# Allegro board dwin.brd
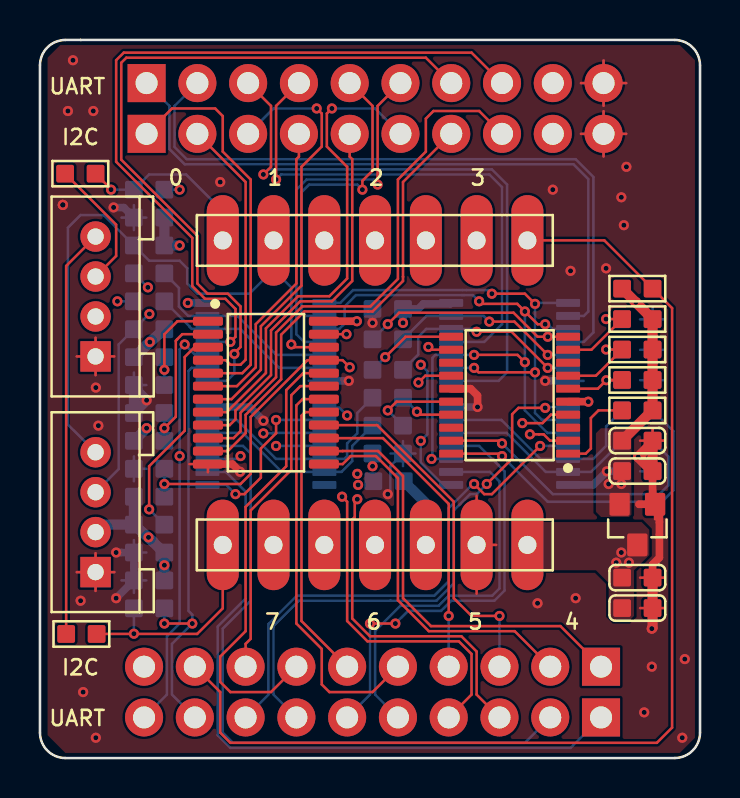
[diagram p0: board, top side]
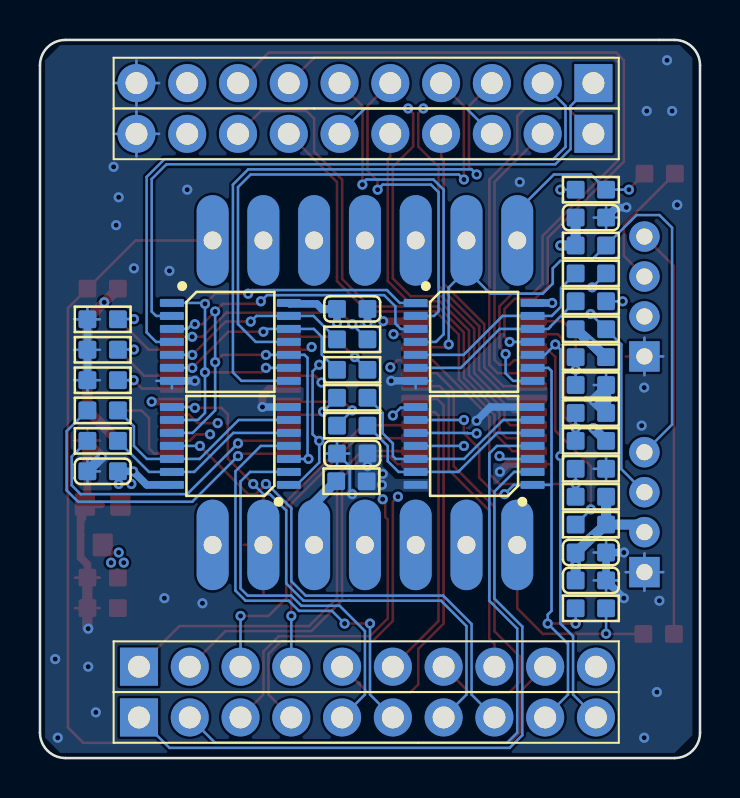
[diagram p1: board, bottom side, seen from below]

Outline 33.02 x 35.94 mm; copper layers: TOP, GND, PWR, BOTTOM. Coordinates in mm from the lower left corner of the outline.
Outline path: 0,34.67 arc(0.37,35.57) 1.27,35.94 31.75,35.94 arc(32.65,35.57) 33.02,34.67 33.02,1.27 arc(32.65,0.37) 31.75,0 1.27,0 arc(0.37,0.37) 0,1.27 0,34.67

## Design rules (mm)
constraint set DEFAULT: min track width 0.127

## Placement (name value [footprint] x y rotation side)
C1  100nF  [C0603]  5.46 8.89 180 bottom
C2  10uF  [C0603]  5.46 10.29 180 bottom
C3  100nF  [C0603]  17.4 22.48 180 bottom
C4  100nF  [C0603]  17.4 15.24 0 bottom
C5  100nF  [C0603]  5.46 27.05 180 bottom
C6  100nF  [C0603]  29.88 14.35 0 bottom
C7  100nF  [C0603]  29.88 7.51 0 top
C8  10uF  [C0603]  29.88 9.03 0 top
C9  100nF  [C0603]  29.88 14.36 0 top
C10  10uF  [C0603]  29.88 15.89 0 top
J1  Header 1x7 2.54mm  [HEADER7P_2D54_DIP_SLOT_0D9]  24.38 25.91 270 top
J2  Header 1x7 2.54mm  [HEADER7P_2D54_DIP_SLOT_0D9]  24.38 10.67 270 top
J3  Header 1x10 2.54mm  [HEADER10P_2D54_DIP]  5.33 31.24 270 bottom
J4  Header 1x10 2.54mm  [HEADER10P_2D54_DIP]  28.07 4.57 90 bottom
J5  Header 1x10 2.54mm  [HEADER10P_2D54_DIP]  5.33 33.78 270 bottom
J6  Header 1x10 2.54mm  [HEADER10P_2D54_DIP]  28.07 2.03 90 bottom
J7  Grove 4P 2.0mm  [HEADER4P-2_0-GROVE-DIP]  2.78 23.1 180 top
J8  Grove 4P 2.0mm  [HEADER4P-2_0-GROVE-DIP]  2.78 12.31 180 top
R1  10K  [R0603]  29.88 23.5 180 top
R2  0R  [R0603]  5.46 28.45 180 bottom
R3  0R  [R0603]  5.46 7.49 0 bottom
R4  10K  [R0603]  5.46 11.68 180 bottom
R5  DNP  [R0603]  5.46 20.07 0 bottom
R6  DNP  [R0603]  5.46 15.88 0 bottom
R7  DNP  [R0603]  5.46 13.08 0 bottom
R8  10K  [R0603]  5.46 18.67 0 bottom
R9  10K  [R0603]  5.46 17.27 0 bottom
R10  10K  [R0603]  5.46 14.48 0 bottom
R11  DNP  [R0603]  29.88 18.92 0 top
R12  10K  [R0603]  29.88 17.4 0 top
R13  0R  [R0603]  17.4 20.95 0 bottom
R14  0R  [R0603]  17.4 16.64 180 bottom
R15  DNP  [R0603]  29.88 20.45 0 top
R16  DNP  [R0603]  29.88 21.97 0 top
R17  0R  [R0603]  17.4 19.43 0 bottom
R18  0R  [R0603]  17.4 18.03 180 bottom
R19  0R  [R0603]  5.46 24.26 0 bottom
R20  0R  [R0603]  29.88 15.88 180 bottom
R21  0R  [R0603]  5.46 22.86 0 bottom
R22  0R  [R0603]  29.88 17.4 180 bottom
R23  10K  [R0603]  29.88 18.91 0 bottom
R24  10K  [R0603]  29.88 20.43 0 bottom
R25  10K  [R0603]  29.88 21.96 0 bottom
R26  4.7K  [R0603]  5.46 21.46 0 bottom
R27  4.7K  [R0603]  5.46 25.65 0 bottom
R28  0R  [R0603]  2.07 6.21 180 top
R29  0R  [R0603]  2.02 29.25 180 top
R30  DNP  [R0603]  17.44 13.86 180 bottom
U1  CONTROLLER-TCA9548A  [TSSOP24_0D65_7_8X4_4X1D2MM]  11.3 18.29 270 top
U2  PCF8574  [TSSOP20-0_65-6_5X4_4X1MM]  23.5 18.16 90 top
U3  CD4066  [TSSOP14_0D65_5X4D4X1D2MM]  23.5 20.83 270 bottom
U4  CD4066  [TSSOP14_0D65_5X4D4X1D2MM]  11.3 15.62 90 bottom
U5  CD4066  [TSSOP14_0D65_5X4D4X1D2MM]  11.3 20.83 270 bottom
U6  CD4066  [TSSOP14_0D65_5X4D4X1D2MM]  23.5 15.62 90 bottom
U7  XC6206P332MR-G  [SOT23]  29.88 11.68 180 top

## Library data of the parts
C1-C10 = CC
J1 J2 = Header 1x7
J3-J6 = Header 1x10
J7 J8 = Header_4P
R1-R30 = R
U1 = TCA9548A
U2 = PCF8574
U3-U6 = CD4066
U7 = LDO_3P

## Footprints (pads in the part's own frame, mm; a bottom-side part is the same pattern mirrored in y, then rotated)
C0603
  rrect 0.889x0.889 smd: 1(-0.762,0) 2(0.762,0)
HEADER4P-2_0-GROVE-DIP
  rect 1.524x1.524 hole 0.813: 1(0,3)
  round 1.524 hole 0.813: 2(0,1) 3(0,-1) 4(0,-3)
HEADER7P_2D54_DIP_SLOT_0D9
  oval 4.532x1.6 hole 0.9: 1(0,0) 2(0,-2.54) 3(0,-5.08) 4(0,-7.62) 5(0,-10.16) 6(0,-12.7) 7(0,-15.24)
HEADER10P_2D54_DIP
  rect 1.905x1.905 hole 1.1: 1(0,0)
  round 1.905 hole 1.1: 2(0,-2.54) 3(0,-5.08) 4(0,-7.62) 5(0,-10.16) 6(0,-12.7) 7(0,-15.24) 8(0,-17.78) 9(0,-20.32) 10(0,-22.86)
R0603
  rrect 0.889x0.889 smd: 1(-0.762,0) 2(0.762,0)
SOT23
  rrect 1.016x1.143 smd: 1(-0.889,-1.016) 2(0.889,-1.016) 3(0,1.016)
TSSOP14_0D65_5X4D4X1D2MM
  rrect 0.4x1.2 smd: 1(-1.95,-2.925) 2(-1.3,-2.925) 3(-0.65,-2.925) 4(0,-2.925) 5(0.65,-2.925) 6(1.3,-2.925) 7(1.95,-2.925) 8(1.95,2.925) 9(1.3,2.925) 10(0.65,2.925) 11(0,2.925) 12(-0.65,2.925) 13(-1.3,2.925) 14(-1.95,2.925)
TSSOP20-0_65-6_5X4_4X1MM
  rrect 0.4x1.2 smd: 1(-2.925,-2.925) 2(-2.275,-2.925) 3(-1.625,-2.925) 4(-0.975,-2.925) 5(-0.325,-2.925) 6(0.325,-2.925) 7(0.975,-2.925) 8(1.625,-2.925) 9(2.275,-2.925) 10(2.925,-2.925) 11(2.925,2.925) 12(2.275,2.925) 13(1.625,2.925) 14(0.975,2.925) 15(0.325,2.925) 16(-0.325,2.925) 17(-0.975,2.925) 18(-1.625,2.925) 19(-2.275,2.925) 20(-2.925,2.925)
TSSOP24_0D65_7_8X4_4X1D2MM
  rrect 0.45x1.5 smd: 1(-3.575,-2.9) 2(-2.925,-2.9) 3(-2.275,-2.9) 4(-1.625,-2.9) 5(-0.975,-2.9) 6(-0.325,-2.9) 7(0.325,-2.9) 8(0.975,-2.9) 9(1.625,-2.9) 10(2.275,-2.9) 11(2.925,-2.9) 12(3.575,-2.9) 13(3.575,2.9) 14(2.925,2.9) 15(2.275,2.9) 16(1.625,2.9) 17(0.975,2.9) 18(0.325,2.9) 19(-0.325,2.9) 20(-0.975,2.9) 21(-1.625,2.9) 22(-2.275,2.9) 23(-2.925,2.9) 24(-3.575,2.9)

## Nets
3V3: C1.1 C2.1 C3.1 C4.1 C5.1 C6.1 C9.1 C10.1 J3.9 J7.2 J8.2 R1.2 R4.2 R5.1 R6.1 R7.1 R11.2 R12.2 R15.2 R16.2 R26.2 R27.2 R30.2 U1.24(VCC) U2.5(VCC) U3.14 U4.14 U5.14 U6.14 U7.2
5V: C7.1 C8.1 J2.1 J5.9 U7.3
GND: C1.2 C2.2 C3.2 C4.2 C5.2 C6.2 C7.2 C8.2 C9.2 C10.2 J2.2 J3.10 J5.10 J7.1 J8.1 R8.1 R9.1 R10.1 R23.2 R24.2 R25.2 U1.12 U2.15 U3.7(VSS) U4.7(VSS) U5.7(VSS) U6.7(VSS) U7.1(VSS)
A0: R5.2 R8.2 U1.1
A1: R6.2 R9.2 U1.2
A2: R7.2 R10.2 U1.21
CH0: R13.1 U2.10
CH1: R17.1 U2.11
CH2: R19.1 U2.12
CH3: R21.1 U2.14
CH4: R14.1 U2.16
CH5: R18.1 U2.17
CH6: R20.1 U2.19
CH7: R22.1 U2.20
KEY_PUSH: J1.1 J4.9 R1.1
RX: J2.7 R3.1 R28.1
RX0: J5.2 U3.4
RX1: J5.4 U3.11
RX2: J5.6 U5.4
RX3: J5.8 U5.11
RX4: J6.2 U4.4
RX5: J6.4 U4.11
RX6: J6.6 U6.4
RX7: J6.8 U6.11
SCL_0: J3.1 U1.5
SCL_1: J3.3 U1.7
SCL_2: J3.5 U1.9
SCL_3: J3.7 U1.11
SCL_4: J4.1 U1.14
SCL_5: J4.3 U1.16
SCL_6: J4.5 U1.18
SCL_7: J4.7 U1.20
SDA_0: J3.2 U1.4
SDA_1: J3.4 U1.6
SDA_2: J3.6 U1.8
SDA_3: J3.8 U1.10
SDA_4: J4.2 U1.13
SDA_5: J4.4 U1.15
SDA_6: J4.6 U1.17
SDA_7: J4.8 U1.19
TX: J1.7 R2.2 R29.1
TX0: J5.1 U3.2
TX1: J5.3 U3.8
TX2: J5.5 U5.2
TX3: J5.7 U5.8
TX4: J6.1 U4.2
TX5: J6.3 U4.8
TX6: J6.5 U6.2
TX7: J6.7 U6.8
XIAO_RX: J6.10 R2.1 U3.3 U3.10 U4.3 U4.10 U5.3 U5.10 U6.3 U6.10
XIAO_SCL: J1.6 J8.4 R27.1 U1.22 U2.2
XIAO_SDA: J1.5 J8.3 R26.1 U1.23 U2.4
XIAO_TX: J6.9 R3.2 U3.1 U3.9 U4.1 U4.9 U5.1 U5.9 U6.1 U6.9
N21649397: R4.1 U1.3
N21651335: R13.2 U3.5 U3.13
N21651359: R17.2 U3.6 U3.12
N21652555: R19.2 U5.5 U5.13
N21652587: R21.2 U5.6 U5.12
N21653000: R14.2 U4.5 U4.13
N21653032: R18.2 U4.6 U4.12
N21653118: R20.2 U6.5 U6.13
N21653150: R22.2 U6.6 U6.12
N21654351: R11.1 R23.1 U2.6
N21654354: R15.1 R24.1 U2.7
N21654357: R16.1 R25.1 U2.9
N21654696: R12.1 U2.1
N21667793: J7.4 R28.2
N21667796: J7.3 R29.2
N21669960: J2.3 R30.1

Pads without a net: J1 2 3 4; J2 4 5 6; J4 10; U2 3 8 13 18

## Via types
v1: diameter 0.508, hole 0.254, TOP to BOTTOM, 126 vias

## Routing (per net, layer and track width the routed paths; a pad name or vN(x,y) marks a point on that pad's centre or on a via; arc(x,y) is an arc through that point)
3V3: length 46.4
  TOP w0.381: U1.24 v1(15.85,21.86) ; U2.5 v1(27.43,17.84)
  TOP w0.508: v1(29.81,22.81) 29.8,22.82 ; 29.8,22.82 R16.2 R15.2 R11.2 R12.2 30.63,17.4 C10.1 ; 29.8,22.82 R1.2
  PWR w0.127: J8.2 2.78,12.25 ; J8.2 3.72,11.31 ; J8.2 1.84,11.31 ; J8.2 2.78,10.37 ; 24.52,31.24 J3.9 ; J3.9 25.65,30.11 ; J3.9 26.78,31.24 ; 2.78,21.16 J7.2 ; J7.2 1.84,22.1 ; J7.2 2.78,23.04
  PWR w0.508: 6.22,10.41 v1(6.22,9.65)
  BOTTOM w0.381: U6.14 27.68,13.67 v1(28.36,14.35) C6.1 ; v1(18.16,21.78) C3.1 18.92,22.48 19.18,22.73 20.52,22.73 U3.14 ; U5.14 v1(7.4,22.78)
  BOTTOM w0.508: v1(5.43,11.04) 6.19,10.29 C2.1 ; R6.1 v1(5.33,16.51) ; v1(6.99,25.65) R27.2 C5.1 ; J8.2 3.16,11.68 R4.2 ; C1.1 v1(6.22,9.65) C2.1 ; R4.2 5.68,10.83 ; R4.2 R7.1 ; R4.2 C2.1 ; v1(5.5,20.82) 4.74,20.07 R5.1 R26.2 5.24,20.61
  vias: v1(15.88,14.22) v1(15.91,13.67) v1(16.64,14.6) v1(28.45,13.72) v1(29.08,13.72)
5V:
  vias: v1(28.83,9.78) v1(29.08,10.29) v1(29.46,9.78)
GND: length 107.6
  TOP w0.127: 30.02,9.03 C8.2 31.27,9.03 ; 30.77,13.45 U7.1 30.77,11.95 ; J2.2 21.84,13.11 ; J2.2 21.84,8.22 ; J2.2 22.82,10.67 ; J7.1 3.72,20.1 ; J7.1 1.84,20.1 ; J7.1 2.78,21.04 ; J7.1 2.78,19.16 ; C10.2 30.65,16.51 ; C10.2 31.27,15.89 ; C10.2 30.02,15.89 ; J3.10 29.32,31.24 ; J3.10 28.19,32.37 ; J3.10 28.19,30.11 ; J3.10 27.06,31.24 ; J8.1 3.72,9.31 ; J8.1 2.78,8.37 ; J8.1 1.84,9.31 ; J8.1 2.78,10.25 ; 31.27,7.51 C7.2 30.02,7.51 ; J5.10 29.32,33.78 ; J5.10 28.19,34.91 ; J5.10 27.06,33.78 ; J5.10 28.19,32.65 ; 7.47,14.71 U1.12 8.4,14.31
  TOP w0.381: U7.1 30.65,12.83 C9.2 ; U7.1 30.99,12.49 30.99,10.03 30.65,9.69 C8.2 ; U7.1 29.97,12.7 ; v1(21.89,17.57) 21.89,18.14 21.55,18.49 U2.15 ; U1.12 9.62,14.71 v1(10.01,14.33)
  TOP w0.508: v1(30.61,6.48) 30.65,6.52 C7.2 C8.2 ; 30.65,15.79 C10.2 ; 30.65,15.79 C9.2 30.63,14.36 v1(29.93,15.07) 30.65,15.79
  GND w0.127: 2.78,8.37 J8.1 ; J8.1 1.84,9.31 ; J8.1 2.78,10.25 ; J8.1 3.72,9.31
  BOTTOM w0.127: J5.10 29.32,33.78 ; J5.10 28.19,32.65 ; J5.10 27.06,33.78 ; J5.10 28.19,34.91 ; 30.02,14.35 C6.2 ; C6.2 30.65,13.73 ; C6.2 30.65,14.97 ; R25.2 30.65,22.58 ; R25.2 31.27,21.96 ; R25.2 30.02,21.96 ; C1.2 5.32,8.89 ; C1.2 4.08,8.89 ; C1.2 4.7,8.27 ; 17.54,15.24 C4.2 ; C4.2 18.16,15.86 ; C4.2 18.78,15.24 ; C4.2 17.53,14.6 17.53,13.33 v1(17.4,13.21) ; C4.2 18.16,14.62 ; 4.08,27.05 C5.2 ; C5.2 5.32,27.05 ; C5.2 4.7,26.43 ; C5.2 4.7,27.67 ; 26.42,18.5 U3.7 27.2,18.88 ; 2.78,19.16 J7.1 ; J7.1 2.78,21.04 ; J7.1 1.84,20.1 ; 4.7,13.86 R10.1 ; R10.1 4.7,15.1 ; R10.1 5.32,14.48 ; 5.32,18.67 R8.1 4.7,19.29 ; 2.78,8.37 J8.1 ; J8.1 3.72,9.31 ; J8.1 1.84,9.31 ; J8.1 2.78,10.25 ; 30.65,18.29 R23.2 ; R23.2 30.02,18.91 ; R23.2 31.27,18.91 ; J3.10 29.32,31.24 ; J3.10 28.19,30.11 ; J3.10 28.19,32.37 ; J3.10 27.06,31.24 ; 14.23,18.5 U5.7 13.45,18.88 ; 30.02,20.43 R24.2 31.27,20.43 ; 5.32,10.29 C2.2 4.7,10.91
  BOTTOM w0.381: U3.7 v1(25.27,18.88) ; U6.7 v1(21.89,17.57) ; C5.2 4.2,27.55 3.69,27.55 v1(3.68,27.56) ; v1(3.81,10.29) C2.2 C1.2 v1(3.81,8) ; v1(16.64,21.78) C3.2 ; v1(11.18,16.88) 10.49,17.57 U4.7 ; U5.7 v1(15.45,18.88) ; R23.2 R24.2 R25.2
  BOTTOM w0.508: R8.1 4.7,18.54 ; 4.7,18.54 R9.1 v1(5.33,17.91) 4.7,18.54 ; C6.2 v1(29.93,15.07)
  vias: v1(1.14,27.69) v1(1.14,27.69) v1(1.4,32.38) v1(1.65,34.93) v1(2.03,7.87) v1(2.16,3.3) v1(2.67,32.38) v1(2.79,18.54) v1(2.79,1.02) v1(2.92,16.64) v1(9.02,28.83) v1(24.89,7.75) v1(25.65,28.45) v1(26.54,24.38) v1(26.8,8) v1(28.32,24.51) v1(29.08,28.07) v1(29.21,26.67) v1(29.34,29.59) v1(30.23,2.29) v1(30.61,4.57) v1(32.13,1.02) v1(32.26,4.95)
A0: length 5.6
  TOP w0.127: U1.1 6.88,21.86 6.22,21.21 v1(6.22,19.43)
  BOTTOM w0.127: R8.2 v1(6.22,19.43) R5.2
A1: length 7.8
  TOP w0.127: U1.2 7.12,21.21 6.86,20.95 6.86,20.95 6.79,20.89 6.79,17.08 v1(6.22,16.51)
  BOTTOM w0.127: R6.2 v1(6.22,16.51) R9.2
A2: length 15.1
  TOP w0.127: v1(6.22,13.72) 10.03,13.72 10.54,14.22 10.54,17.07 13.38,19.91 U1.21 15.14,19.91 v1(15.49,19.56)
  BOTTOM w0.127: R7.2 v1(6.22,13.72) R10.2
CH0: length 10.8
  TOP w0.127: U2.10 v1(25.4,21.09) 24.89,21.09 23.69,22.29 17.97,22.29 v1(17.4,21.72)
  BOTTOM w0.127: R13.1 v1(17.4,21.72)
CH1: length 4.6
  TOP w0.127: U2.11 18.29,21.09 v1(17.27,20.07)
  BOTTOM w0.127: v1(17.27,20.07) R17.1
CH2: length 19
  TOP w0.127: v1(19.43,20.57) 19.57,20.44 U2.12
  PWR w0.127: v1(19.43,20.57) 15.34,20.57 14.2,21.72 5.21,21.72 4.95,21.97 4.95,23.11 v1(5.4,23.56)
  BOTTOM w0.127: v1(5.4,23.56) R19.1
CH3: length 21.6
  TOP w0.127: U2.14 19.28,19.14 v1(18.94,18.8)
  PWR w0.127: v1(3.87,22.86) 3.87,21.4 5.02,20.26 8.45,20.26 9.02,19.69 10.29,19.69 11.94,21.34 13.97,21.34 14.99,20.32 16.13,20.32 17.65,18.8 v1(18.94,18.8)
  BOTTOM w0.127: v1(3.87,22.86) R21.1
CH4: length 4.4
  TOP w0.127: U2.16 17.84,17.84 v1(17.4,17.4)
  BOTTOM w0.127: v1(17.4,17.4) R14.1
CH5: length 2.8
  TOP w0.127: U2.17 19.01,17.19 v1(18.86,17.34)
  BOTTOM w0.127: v1(18.86,17.34) R18.1
CH6: length 14.7
  TOP w0.127: U2.19 22.98,15.89 v1(23.11,15.75)
  BOTTOM w0.127: v1(23.11,15.75) 25.65,13.21 30.99,13.21 31.43,13.65 31.43,15.09 R20.1
CH7: length 16.8
  TOP w0.127: U2.20 22.99,15.24 v1(23.11,15.11)
  BOTTOM w0.127: v1(23.11,15.11) 25.4,12.83 31.12,12.83 31.69,13.4 31.69,16.36 R22.1
KEY_PUSH: length 56.6
  TOP w0.127: J1.1 28.23,25.91 R1.1 31.62,22.52 31.62,1.52 30.86,0.76 9.53,0.76 9.02,1.27 9.02,3.3 J4.9
RX: length 11.3
  TOP w0.127: 4.69,6.21 7.86,6.21 9.14,7.49 J2.7 ; 4.69,6.21 v1(4.7,6.22) ; 4.69,6.21 R28.1
  BOTTOM w0.127: R3.1 v1(4.7,6.22)
RX0: length 34.5
  BOTTOM w0.127: U3.4 27.21,20.83 27.69,21.3 27.69,29.08 26.8,29.97 7.34,29.97 6.73,30.59 6.73,32.64 J5.2
RX1: length 26.7
  TOP w0.127: v1(11.81,28.96) 11.81,32.64 J5.4
  BOTTOM w0.127: U3.11 22.23,20.83 23.11,21.72 23.11,28.57 22.48,29.21 12.06,29.21 v1(11.81,28.96)
RX2: length 18.8
  TOP w0.127: J5.6 16.89,32.64 v1(16.89,28.7)
  BOTTOM w0.127: U5.4 13.21,20.83 12.83,21.21 12.83,28.45 13.34,28.96 16.7,28.96 16.89,28.77 v1(16.89,28.7)
RX3: length 38.6
  TOP w0.127: J5.8 21.59,35.31 4.19,35.31 3.81,34.93 3.81,29.84 7.62,26.03 7.62,23.62 8.25,22.99 9.27,22.99 9.78,22.48 9.78,21.08 v1(9.53,20.83) 9.53,20.89
  BOTTOM w0.127: U5.11 v1(9.53,20.83)
RX4: length 34
  BOTTOM w0.127: U4.4 10.16,15.62 10.54,15.24 10.54,7.87 9.14,6.48 9.14,1.27 9.65,0.76 24.26,0.76 J6.2
RX5: length 24.8
  TOP w0.127: J6.4 21.59,3.18 21.59,5.21 20.96,5.84 16.38,5.84 15.37,6.86 15.37,12.83 v1(15.11,13.08)
  PWR w0.127: v1(11.81,15.62) 14.48,15.62 15.11,14.99 v1(15.11,13.08)
  BOTTOM w0.127: v1(11.81,15.62) U4.11
RX6: length 21.8
  TOP w0.127: v1(16.51,6.73) v1(17.78,6.73)
  BOTTOM w0.127: U6.4 21.97,15.62 23.24,14.35 23.24,8.38 22.73,7.87 20.57,7.87 20.07,7.37 18.42,7.37 v1(17.78,6.73) ; J6.6 16.51,3.18 v1(16.51,6.73)
RX7: length 26.4
  TOP w0.127: v1(21.72,13.72) 22.23,13.21 22.61,13.21 v1(25.02,15.62)
  BOTTOM w0.127: J6.8 11.43,3.18 11.43,6.71 12.85,8.13 19.73,8.13 20.45,8.85 20.45,12.51 21.66,13.72 v1(21.72,13.72) ; v1(25.02,15.62) U6.11
SCL_0: length 19.8
  TOP w0.127: J3.1 6.6,32.51 8.76,32.51 9.14,32.13 9.14,30.35 10.54,28.96 10.54,19.69 10.12,19.26 U1.5
SCL_1: length 21.7
  TOP w0.127: v1(13.84,32.51) 14.1,32.26 14.1,30.61 13.08,29.59 13.08,23.64 11.05,21.61 11.05,19.43 9.58,17.96 U1.7
  BOTTOM w0.127: v1(13.84,32.51) 11.68,32.51 J3.3
SCL_2: length 19.2
  TOP w0.127: J3.5 15.49,30.1 15.62,29.97 15.62,23.88 14.61,22.86 13.02,22.86 11.56,21.4 11.56,19.17 9.78,17.39 9.78,16.95 9.49,16.66 U1.9
SCL_3: length 23.5
  TOP w0.127: J3.7 18.16,28.83 18.16,24.09 18.16,23.88 16.64,22.35 16.43,22.35 16.43,22.35 13.23,22.35 12.06,21.19 12.06,18.96 10.29,17.18 10.29,16.26 9.39,15.36 U1.11
SCL_4: length 21.9
  TOP w0.127: U1.14 15.14,15.36 15.15,15.37 16.91,15.37 18.16,14.12 18.16,8 19.56,6.6 26.04,6.6 J4.1
SCL_5: length 18.1
  TOP w0.127: U1.16 16.87,16.66 20.7,12.83 20.7,8 21.59,7.11 v1(22.99,7.11)
  BOTTOM w0.127: J4.3 v1(22.99,7.11)
SCL_6: length 20.5
  TOP w0.127: U1.18 13.14,17.96 12.83,17.65 12.83,6.73 14.1,5.46 14.1,3.68 14.48,3.3 16.64,3.3 J4.5
SCL_7: length 22.8
  TOP w0.127: J4.7 11.56,3.3 9.53,3.3 9.02,3.81 9.02,5.08 10.29,6.35 10.29,12.57 12.32,14.6 12.32,18.42 13.17,19.26 U1.20
SDA_0: length 14.4
  TOP w0.127: J3.2 10.29,28.83 10.29,19.94 10.03,19.69 9.53,19.69 9.3,19.91 U1.4
SDA_1: length 15.4
  TOP w0.127: J3.4 12.95,30.1 12.83,29.97 12.83,23.75 10.8,21.72 10.8,19.56 9.85,18.61 U1.6
SDA_2: length 24
  TOP w0.127: U1.8 9.34,17.31 11.3,19.27 11.3,21.51 12.91,23.11 14.48,23.11 15.37,24 15.37,29.59 14.35,30.61 14.35,32.26 v1(14.61,32.51)
  BOTTOM w0.127: v1(14.61,32.51) 16.76,32.51 J3.6
SDA_3: length 27.7
  TOP w0.127: U1.10 9.68,16.01 10.03,16.36 10.03,17.28 11.81,19.06 11.81,21.3 13.12,22.61 16.53,22.61 17.91,23.98 17.91,28.96 19.3,30.35 19.3,32 19.69,32.38 21.97,32.38 J3.8
SDA_4: length 19.4
  TOP w0.127: J4.2 23.75,6.35 19.45,6.35 17.91,7.9 17.91,14.01 16.81,15.11 15.54,15.11 15.14,14.71 U1.13
SDA_5: length 15.8
  TOP w0.127: U1.15 17.16,16.01 20.45,12.72 v1(20.45,7.11)
  BOTTOM w0.127: J4.4 v1(20.45,7.11)
SDA_6: length 14.7
  TOP w0.127: U1.17 13.26,17.31 13.08,17.13 13.08,6.86 J4.6
SDA_7: length 16.4
  TOP w0.127: U1.19 13.03,18.61 12.57,18.16 12.57,14.42 10.54,12.39 10.54,5.97 10.29,5.71 J4.8
TX: length 9.3
  TOP w0.127: v1(3.56,28.45) 3.56,28.47 R29.1
  BOTTOM w0.127: J1.7 9.14,27.37 7.31,29.21 5.46,29.21 R2.2 v1(3.56,28.45)
TX0: length 33.1
  BOTTOM w0.127: U3.2 27.21,22.13 27.43,22.35 27.43,28.98 26.69,29.72 7.24,29.72 6.48,30.48 6.48,32.64 J5.1
TX1: length 30.2
  TOP w0.127: v1(11.18,29.21) 11.56,29.59 11.56,32.64 J5.3
  BOTTOM w0.127: U3.8 22.94,18.88 23.37,19.3 23.37,28.7 22.61,29.46 11.43,29.46 v1(11.18,29.21)
TX2: length 16.5
  TOP w0.127: v1(16.13,28.45) 16.13,28.89 16.64,29.4 16.64,32.64 J5.5
  BOTTOM w0.127: U5.2 13.31,22.13 13.08,22.35 13.08,28.32 13.46,28.7 15.88,28.7 v1(16.13,28.45)
TX3: length 37.4
  TOP w0.127: v1(9.73,20.23) 9.73,20.27 10.03,20.57 10.03,22.61 9.4,23.24 8.38,23.24 7.87,23.75 7.87,26.14 4.06,29.95 4.06,34.8 4.32,35.05 19.3,35.05 J5.7
  BOTTOM w0.127: v1(9.73,20.23) 9.73,19.25 9.35,18.88 U5.8
TX4: length 35.2
  BOTTOM w0.127: J6.1 26.54,0.51 9.53,0.51 8.89,1.14 8.89,6.58 10.29,7.98 10.29,13.33 9.3,14.32 U4.2
TX5: length 22.5
  TOP w0.127: v1(15.88,12.95) 15.75,12.83 15.75,12.06 15.62,11.94 15.62,6.99 16.51,6.1 21.08,6.1 21.84,5.33 21.84,3.18 J6.3
  PWR w0.127: v1(15.37,17.14) 15.37,13.46 15.56,13.27 15.56,13.22 15.7,13.08 15.75,13.08 v1(15.88,12.95)
  BOTTOM w0.127: v1(15.37,17.14) 14.98,17.54 14.26,17.54 U4.8
TX6: length 19.9
  BOTTOM w0.127: J6.5 16.76,3.18 16.76,6.36 18.03,7.62 19.94,7.62 20.45,8.13 22.63,8.13 22.99,8.49 22.99,13.84 22.51,14.32 U6.2
TX7: length 27.8
  TOP w0.127: v1(22.35,13.72) 23.62,14.99 23.62,17.21 23.94,17.53 v1(25.27,17.53)
  BOTTOM w0.127: v1(25.27,17.53) 25.32,17.57 U6.8 ; J6.7 11.68,3.18 11.68,6.6 12.95,7.87 17.55,7.87 19.83,7.87 20.7,8.74 20.7,12.39 21.52,13.21 21.84,13.21 v1(22.35,13.72)
XIAO_RX: length 84.5
  TOP w0.127: v1(21.97,22.86) 22.1,22.73 23.88,22.73 v1(24.26,22.35) 24.9,21.71 v1(25.27,21.71) ; v1(24.26,19.81) 23.89,20.18 v1(21.72,20.18)
  PWR w0.127: v1(6.99,28.45) 4.57,26.03 4.57,21.84 5.08,21.34 6.6,21.34 v1(7.24,20.7) ; v1(6.99,15.11) v1(10.03,15.11) 10.85,15.93 10.86,15.93 v1(11.18,16.25) 11.8,16.25 13.21,17.65 16.38,17.65 19.06,14.97 v1(19.59,14.97)
  BOTTOM w0.127: v1(21.72,20.18) U3.10 19.78,20.18 19.63,20.03 19.63,15.02 v1(19.59,14.97) U6.3 ; U4.10 11.64,16.27 11.62,16.26 11.18,16.26 v1(11.18,16.25) ; v1(25.27,21.71) 25.4,21.71 25.64,21.48 U3.3 ; v1(21.97,22.86) 21.66,23.17 21.22,23.17 21.12,23.17 15.8,23.17 15.24,22.61 15.24,21.75 15.15,21.66 14.97,21.48 U5.3 ; J6.10 6.35,3.18 6.35,6.1 6.99,6.73 v1(6.99,15.11) 6.99,20.45 v1(7.24,20.7) 7.76,20.18 U5.10 ; U4.3 9.89,14.97 v1(10.03,15.11) ; v1(24.26,22.35) v1(24.26,19.81) 24.26,17.4 25.39,16.27 U6.10 ; R2.1 v1(6.99,28.45)
XIAO_SCL: length 48
  TOP w0.127: v1(12.57,20.7) 12.71,20.56 U1.22 ; U2.2 25.52,15.89 25.2,16.2 24.96,16.2 24.95,16.2 v1(24.51,16.2)
  PWR w0.127: v1(12.57,20.7) 13.21,20.07 15.75,20.07 17.65,18.16 21.97,18.16 23.93,16.2 v1(24.51,16.2)
  BOTTOM w0.127: 11.68,24.44 12.57,23.55 v1(12.57,20.7) ; 11.68,24.44 J1.6 ; 11.68,24.44 10.48,23.24 7.87,23.24 7.37,23.75 7.37,24.51 6.99,24.89 5.46,24.89 R27.1 3.18,27.18 2.03,27.18 1.4,26.54 1.4,16.69 J8.4
XIAO_SDA: length 39.4
  TOP w0.127: v1(24.13,16.76) 25.14,16.76 25.56,17.19 U2.4 ; U1.23 v1(15.33,21.21)
  PWR w0.127: v1(24.13,16.76) 22.48,18.41 22.48,20.32 22.1,20.7 20.19,20.7 19.68,21.21 v1(15.33,21.21) 14.32,22.22 ; 14.32,22.22 14.24,22.31 14.24,22.34 14.22,22.35 J1.5 ; 14.32,22.22 v1(5.47,22.22)
  BOTTOM w0.127: J8.3 3.94,14.46 3.94,20.7 R26.1 5.46,22.22 v1(5.47,22.22)
XIAO_TX: length 74.5
  TOP w0.127: v1(22.61,23.24) 24.26,23.24 v1(24.77,22.73) ; v1(6.22,6.73) v1(7.62,6.73) ; v1(9.78,13.21) 10.22,13.21 11.05,14.03 11.05,15.49 11.81,16.26 v1(11.81,16.92) ; v1(21.72,19.53) 21.94,19.3 v1(24.77,19.3)
  PWR w0.127: v1(21.72,19.53) 19.65,19.53 19.49,19.69 v1(19.05,19.69) ; v1(19.05,15.88) 19.05,16.38 17.27,18.16 13.05,18.16 v1(11.81,16.92)
  BOTTOM w0.127: 7.43,13.65 7.45,13.67 U4.1 9.32,13.67 v1(9.78,13.21) ; 7.43,13.65 7.43,19.37 7.49,19.43 7.49,19.43 7.59,19.53 U5.9 ; 7.43,13.65 7.43,7.37 7.62,7.18 v1(7.62,6.73) 6.6,5.71 6.6,3.18 J6.9 ; U5.1 15.02,22.78 15.66,23.42 21.12,23.42 21.33,23.42 22.42,23.42 v1(22.61,23.24) ; U3.9 v1(21.72,19.53) ; v1(11.81,16.92) U4.9 ; U6.1 20.17,13.67 19.05,14.79 v1(19.05,15.88) 19.38,16.21 19.38,19.35 v1(19.05,19.69) ; U6.9 25.12,16.92 24.77,17.27 v1(24.77,19.3) v1(24.77,22.73) 24.81,22.78 U3.1 ; R3.2 v1(6.22,6.73)
N21649397: length 10.8
  TOP w0.127: U1.3 7.73,20.56 7.24,20.07 7.24,16.38 5.46,14.6 v1(5.46,12.45)
  BOTTOM w0.127: R4.1 v1(5.46,12.45)
N21651335: length 9.6
  TOP w0.127: v1(25.4,20.18) 23.73,21.84 v1(22.48,21.84)
  BOTTOM w0.127: v1(25.4,20.18) U3.5 ; R13.2 19.33,22.13 U3.13 22.2,22.13 v1(22.48,21.84)
N21651359: length 10.4
  TOP w0.127: v1(25.4,19.53) 23.59,21.34 v1(21.84,21.34)
  BOTTOM w0.127: v1(21.84,21.34) 21.7,21.48 U3.12 19.32,21.48 18.92,21.08 18.92,20.19 R17.2 ; U3.6 v1(25.4,19.53)
N21652555: length 10.2
  BOTTOM w0.127: R19.2 6.95,23.53 6.95,22.59 7.42,22.13 U5.13 9.88,22.13 11.83,20.18 U5.5
N21652587: length 9.4
  BOTTOM w0.127: U5.6 11.97,19.53 10.02,21.48 U5.12 7.59,21.48 7.49,21.57 7.49,21.59 R21.2
N21653000: length 10.5
  BOTTOM w0.127: R14.2 15.62,15.62 15.62,14.86 15.08,14.32 U4.13 12.09,14.32 10.15,16.27 U4.5
N21653032: length 11.3
  BOTTOM w0.127: R18.2 15.88,17.27 15.88,16.26 15.37,15.75 15.37,15.11 15.22,14.97 U4.12 11.8,14.97 9.85,16.92 U4.6
N21653118: length 10
  BOTTOM w0.127: U6.5 23.35,16.27 25.3,14.32 U6.13 27.57,14.32 R20.2
N21653150: length 10.9
  BOTTOM w0.127: U6.6 23.08,16.92 25.03,14.97 U6.12 27.67,14.97 28.32,15.62 28.32,16.6 R22.2
N21654351: length 4.3
  TOP w0.127: 28.49,18.92 R11.1 29.11,18.91 v1(28.33,18.91) 27.91,18.49 U2.6
  BOTTOM w0.127: R23.1 v1(28.33,18.91)
N21654354: length 4.9
  TOP w0.127: v1(28.32,20.45) R15.1 27.81,19.14 U2.7
  BOTTOM w0.127: R24.1 29.11,20.45 v1(28.32,20.45)
N21654357: length 4.9
  TOP w0.127: U2.9 27.59,20.44 R16.1 v1(28.32,21.97)
  BOTTOM w0.127: R25.1 29.11,21.97 v1(28.32,21.97)
N21654696: length 4.5
  TOP w0.127: U2.1 27.3,15.24 27.56,15.49 27.56,17.02 27.94,17.4 R12.1
N21667793: length 20.5
  TOP w0.127: R28.2 1.31,24.63 J7.4
N21667796: length 6.6
  TOP w0.127: J7.3 3.81,25.13 3.81,26.7 R29.2
N21669960: length 3.6
  BOTTOM w0.508: R30.1 19.3,12.75 J2.3

## Copper pours and planes (outline as drawn; the poured copper is in the pictures)
3V3 on TOP: 29.46,12.06 29.59,12.19 29.59,16.38 29.46,16.51 28.07,16.51 27.81,16.26 27.81,12.32 28.07,12.06
3V3 on BOTTOM: 13.59,13.33 17.02,13.33 17.27,13.59 17.27,15.62 17.15,15.75 16.13,15.75 15.88,15.49 15.88,14.6 15.24,13.97 13.59,13.97 13.46,13.84 13.46,13.46
3V3 on PWR: 1.02,35.69 23.24,35.69 23.62,35.31 23.62,32.64 24.51,31.75 28.45,31.75 29.97,30.23 29.97,12.57 28.07,10.67 28.07,8 28.58,7.49 32.26,7.49 32.77,6.99 32.77,1.02 32,0.25 1.27,0.25 0.38,1.14 0.38,35.05 ; 8 cut-outs
5V on TOP: 28.7,6.86 29.46,6.86 29.72,7.11 29.72,9.4 30.48,10.16 30.48,11.43 30.1,11.81 24,11.81 23.62,11.43 23.62,10.03 24.26,9.4 27.81,9.4 28.45,8.76 28.45,7.11
5V on PWR: 24.51,35.69 32,35.69 32.77,34.93 32.77,8.51 32.26,8 28.7,8 28.45,8.25 28.45,10.41 30.35,12.32 30.35,30.73 28.7,32.38 24.77,32.38 24.26,32.89 24.26,35.43
GND on TOP: 1.02,35.69 32,35.69 32.77,34.93 32.77,1.02 32,0.25 1.27,0.25 0.38,1.14 0.38,35.05 ; 37 cut-outs
GND on BOTTOM: 1.02,35.69 32,35.69 32.77,34.93 32.77,1.02 32,0.25 1.27,0.25 0.38,1.14 0.38,35.05 ; 27 cut-outs
GND on GND: 1.02,35.69 32,35.69 32.77,34.93 32.77,1.02 32,0.25 1.27,0.25 0.38,1.14 0.38,35.05

## Text on the board
Ref Des/Silkscreen Top: UART | I2C | 0 | 7 | 1 | 6 | 2 | 5 | 3 | 4 | LAYER 2 - SECONDARY SIDE - SIGNAL | LAYER 1 - PRIMARY SIDE - SIGNAL | LAYER# | COPPER WEIGHT | HALF+PLATING | (OZ) | IMPEDANCE CONTROL | +/- 10% | 50ohm SINGLE ENDED | TRACE WIDTH | TRACE WIDTH / SPACE | 90ohm DIFFERENTIAL | 100ohm DIFFERENTIAL | 9.5/5 | 6.5/5 | LAYER STACK-UP - ALL DIMENSIONS IN INCHES
User.23: FIGURE | FINISHED_SIZE | 35.43x35.43 | SLOT HOLES: TOP to BOTTOM | ALL UNITS ARE IN MILS | ROTATION | 90.000 | PLATED | QTY | 14 | TOTAL HOLES:
User.24: FIGURE | FINISHED_SIZE | 10.0 | 43.31 | DRILL CHART: TOP to BOTTOM | ALL UNITS ARE IN MILS | ROTATION | - | PLATED | QTY | 123 | 40 | 163 | TOTAL HOLES:
